# EAGLE board WemosD1_Mini_SMD1206 (EAGLE 9.6.2)
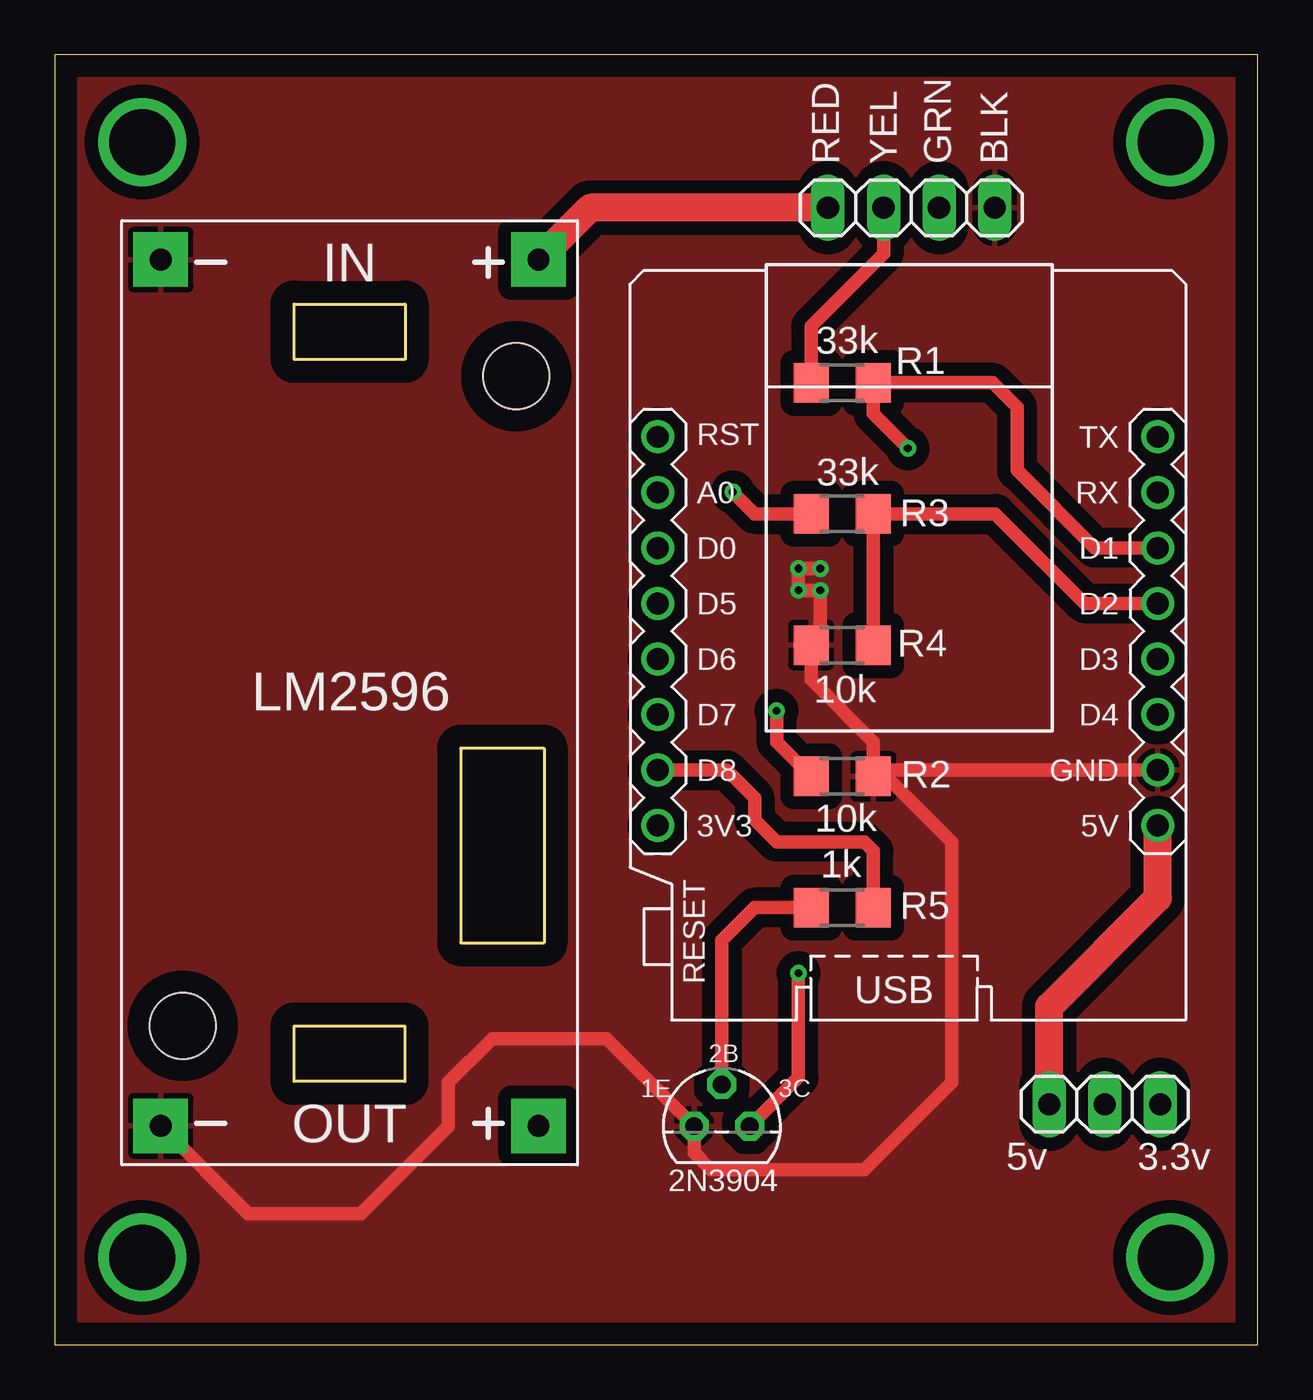
[diagram p0: board, top side]
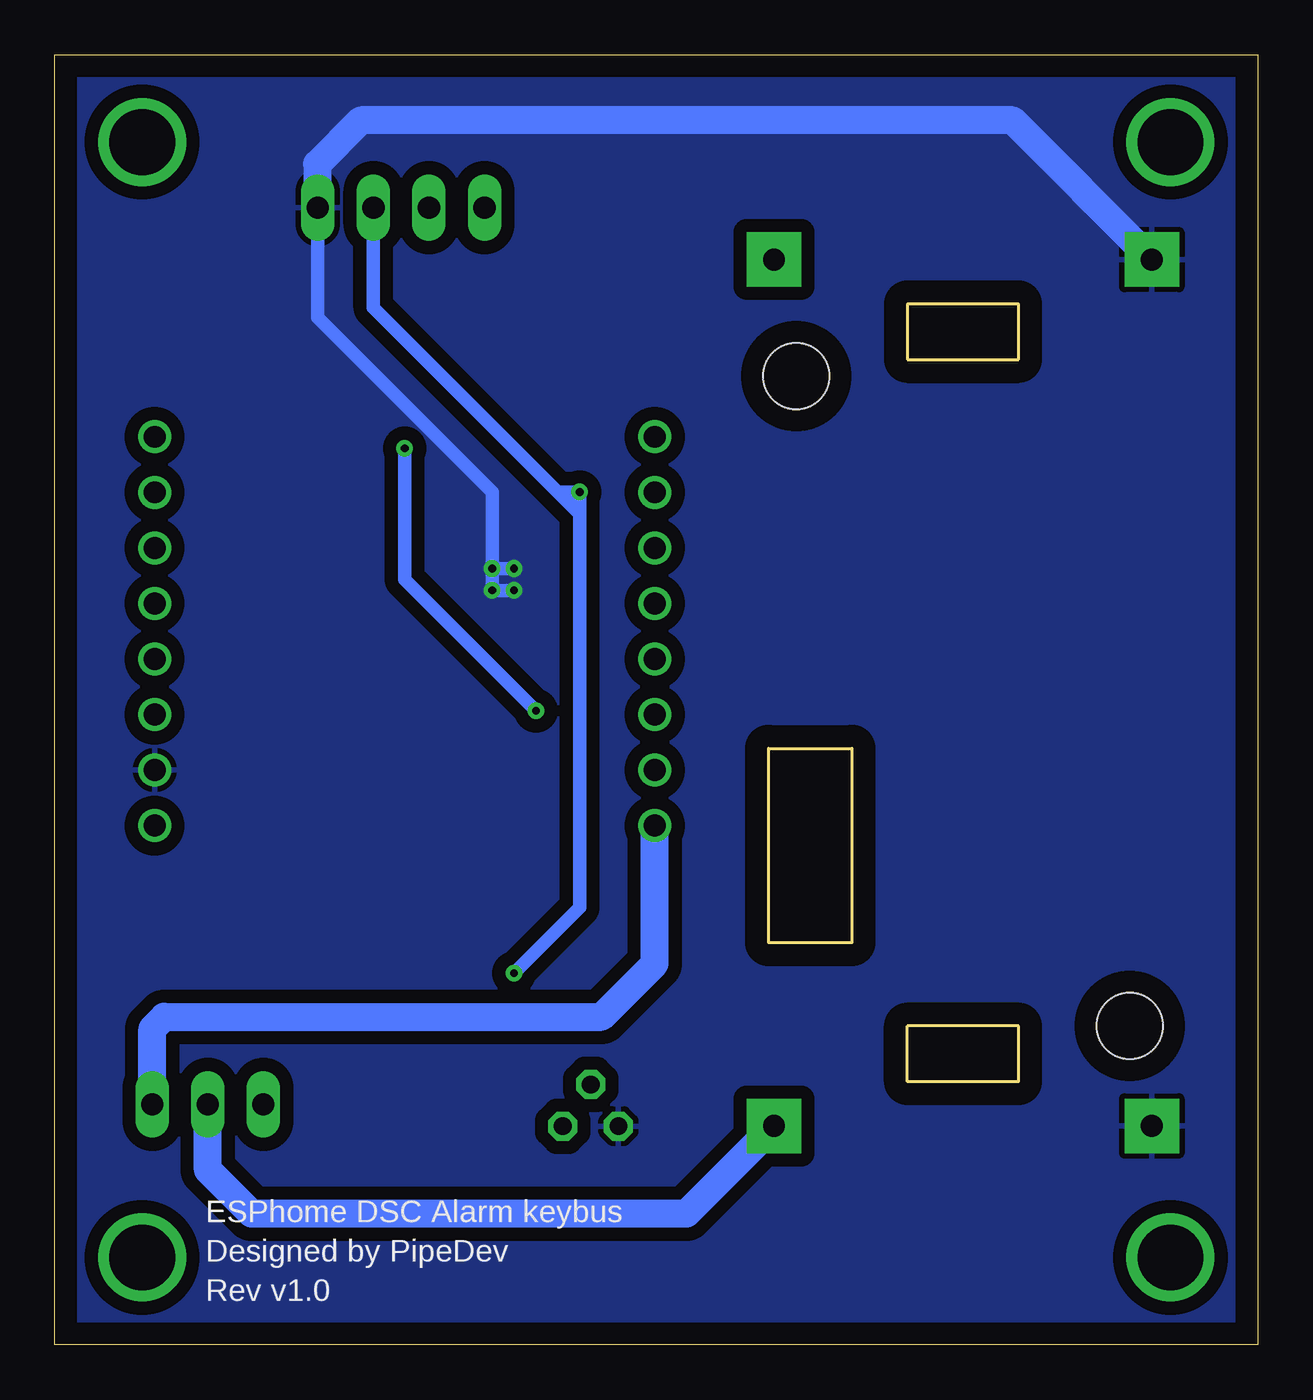
[diagram p1: board, bottom side, seen from below]

Size 55 x 59 mm. Coordinates in mm from the lower left corner, seen from the top.
Outline: 0,0 55,0 55,59 0,59 0,0
Copper layers (1*16): Top 0.035mm / dielectric 1.5mm / Bottom 0.035mm
Design rules "default": minimum track width 6mil, minimum drill 0.35mm, track to track 6mil, track to pad 6mil, pad to pad 6mil, via to via 6mil, smd to smd 6mil, copper to edge 40mil, drill to drill 6mil, minimum pad ring 10mil, minimum via ring 8mil, stop-mask expansion 4mil, vias tented up to drill 0mil, thermal gap 10mil

## Footprints (pad centres in the part's own frame; a part is rotated, then mirrored left to right if it is on the bottom)
1X03 = drill 1.016 long: 1 -2.54,0; 2 0,0; 3 2.54,0
R1206 = smd 1.6 x 1.803: 1 -1.422,0; 2 1.422,0
TO92 = drill 0.813 octagon: 1 1.27,0; 2 0,1.905; 3 -1.27,0
1X04 = drill 1.016 long: 1 -3.81,0; 2 -1.27,0; 3 1.27,0; 4 3.81,0
WEMOS-D1-MINI = drill 1: JP1.1 -11.43,9.525; JP1.2 -11.43,6.985; JP1.3 -11.43,4.445; JP1.4 -11.43,1.905; JP1.5 -11.43,-0.635; JP1.6 -11.43,-3.175; JP1.7 -11.43,-5.715; JP1.8 -11.43,-8.255; JP2.1 11.43,9.525; JP2.2 11.43,6.985; JP2.3 11.43,4.445; JP2.4 11.43,1.905; JP2.5 11.43,-0.635; JP2.6 11.43,-3.175; JP2.7 11.43,-5.715; JP2.8 11.43,-8.255
DC-DC-STEP-DOWN-LM2596 = drill 1 pad 2.5 square: IN+ -19.812,8.636; IN- -19.812,-8.636; OUT+ 19.812,8.636; OUT- 19.812,-8.636 | hole 3: -14.478,7.62; 15.24,-7.62

## Placement (x,y rotation side)
JUMPERS  [1X03]  48,11 180 top
R1  33k  [R1206]  36,44 180 top
R2  10k  [R1206]  36,26 0 top
R3  33k  [R1206]  36,38 180 top
R4  10k  [R1206]  36,32 0 top
R5  1k  [R1206]  36,20 0 top
T1  2N3904  [TO92]  30.5,10 0 top
TERMINALBLOCK  [1X04]  39.16,52 0 top
U$1  WEMOS-D1-MINI  [WEMOS-D1-MINI]  39,32 0 top
U$2  DC-DC-STEP-DOWN-LM2596  [DC-DC-STEP-DOWN-LM2596]  13.48,29.82 270 top

## Library data of the parts
JUMPERS = pinheadDSC1
R1-R5 = rcl; SPICEPREFIX: R
T1 = transistor
TERMINALBLOCK = pinhead
U$1 U$2 = diy-modules

## Nets
GND: R2.2 R4.1 T1.3 TERMINALBLOCK.4 U$1.JP2.7 U$2.IN- U$2.OUT-
N$1: R1.1 R2.1 U$1.JP2.3
N$2: R1.2 TERMINALBLOCK.2
N$3: R3.1 R4.2 U$1.JP2.4
N$4: R3.2 T1.1 TERMINALBLOCK.3
N$5: TERMINALBLOCK.1 U$2.IN+
N$6: JUMPERS.2 U$2.OUT+
N$7: R5.1 T1.2
N$8: R5.2 U$1.JP1.7
N$9: JUMPERS.3 U$1.JP2.8
N$10: JUMPERS.1 U$1.JP1.8

## Tracks (layer width: path | path; a pad name or v marks a point on that pad's centre or on a via)
GND  (via drill 0.35)
  Top 0.61: 37.71,26.29 R2.2 37.42,27.58 34.58,30.42 R4.1 35,32.42 v35,34.5 v34,34.5 v34,35.5 v35,35.5 | 37.71,26.29 U$1.JP2.7 | 37.71,26.29 41,22.99 41,12 37,8 30,8 29.23,8.77 T1.3 25.23,14 20,14 18,12 18,10 14,6 8.85,6 U$2.OUT-
  Bottom 0.61: TERMINALBLOCK.4 42.97,46.97 35,39 v35,35.5 | v35,35.5 v34,35.5 | v35,35.5 v35,34.5 v34,34.5
  Bottom 1.27: U$2.IN- 11.21,56 41,56 43,54 43,52.03 TERMINALBLOCK.4
  pour Top (isolate 0.61): 0,0 0,59 55,59 55,0
  pour Bottom (isolate 0.61): 0,59 0,0 55,0 55,59
N$1  (via drill 0.35)
  Top 0.61: U$1.JP2.3 47.55,36.45 44,40 44,42.88 42.88,44 R1.1 37.42,42.58 v39,41 | R2.1 33,27.58 v33,29
  Bottom 0.61: v33,29 39,35 v39,41
N$2
  Top 0.61: TERMINALBLOCK.2 37.89,49.89 34.58,46.58 R1.2
N$3
  Top 0.61: U$1.JP2.4 47.09,33.91 43,38 R3.1 R4.2
N$4  (via drill 0.35)
  Top 0.61: T1.1 34,12.23 v34,17 | v31,39 32,38 R3.2
  Bottom 0.61: 31,38 31,20 v34,17 | TERMINALBLOCK.3 40.43,47.43 32,39 | 31,38 32,39 | 31,38 v31,39 32,39
N$5
  Top 1.27: U$2.IN+ 24.48,52 TERMINALBLOCK.1
N$6
  Bottom 1.27: U$2.OUT+ 26.12,6 46,6 48,8 JUMPERS.2
N$7
  Top 0.61: R5.1 32,20 30.5,18.5 T1.2
N$8
  Top 0.61: U$1.JP1.7 30.71,26.29 32,25 32,24 33,23 37,23 37.42,22.58 R5.2
N$9
  Top 1.27: JUMPERS.3 45.46,15.46 50.43,20.43 U$1.JP2.8
N$10
  Bottom 1.27: JUMPERS.1 50.54,14.46 50,15 30,15 27.57,17.43 U$1.JP1.8
N$11  (via drill 3)
  other vias: 4,55
N$12  (via drill 3)
  other vias: 51,55
N$13  (via drill 3)
  other vias: 4,4
N$14  (via drill 3)
  other vias: 51,4

## Text on the board
tNames: RED | YEL | GRN | BLK | LM2596 | 2B | 1E | 3C | 5v | 3.3v | 2N3904
bNames: ESPhome DSC Alarm keybus | Designed by PipeDev | Rev v1.0